# EAGLE board MONSTR_V0.1 (EAGLE 6.5.0)
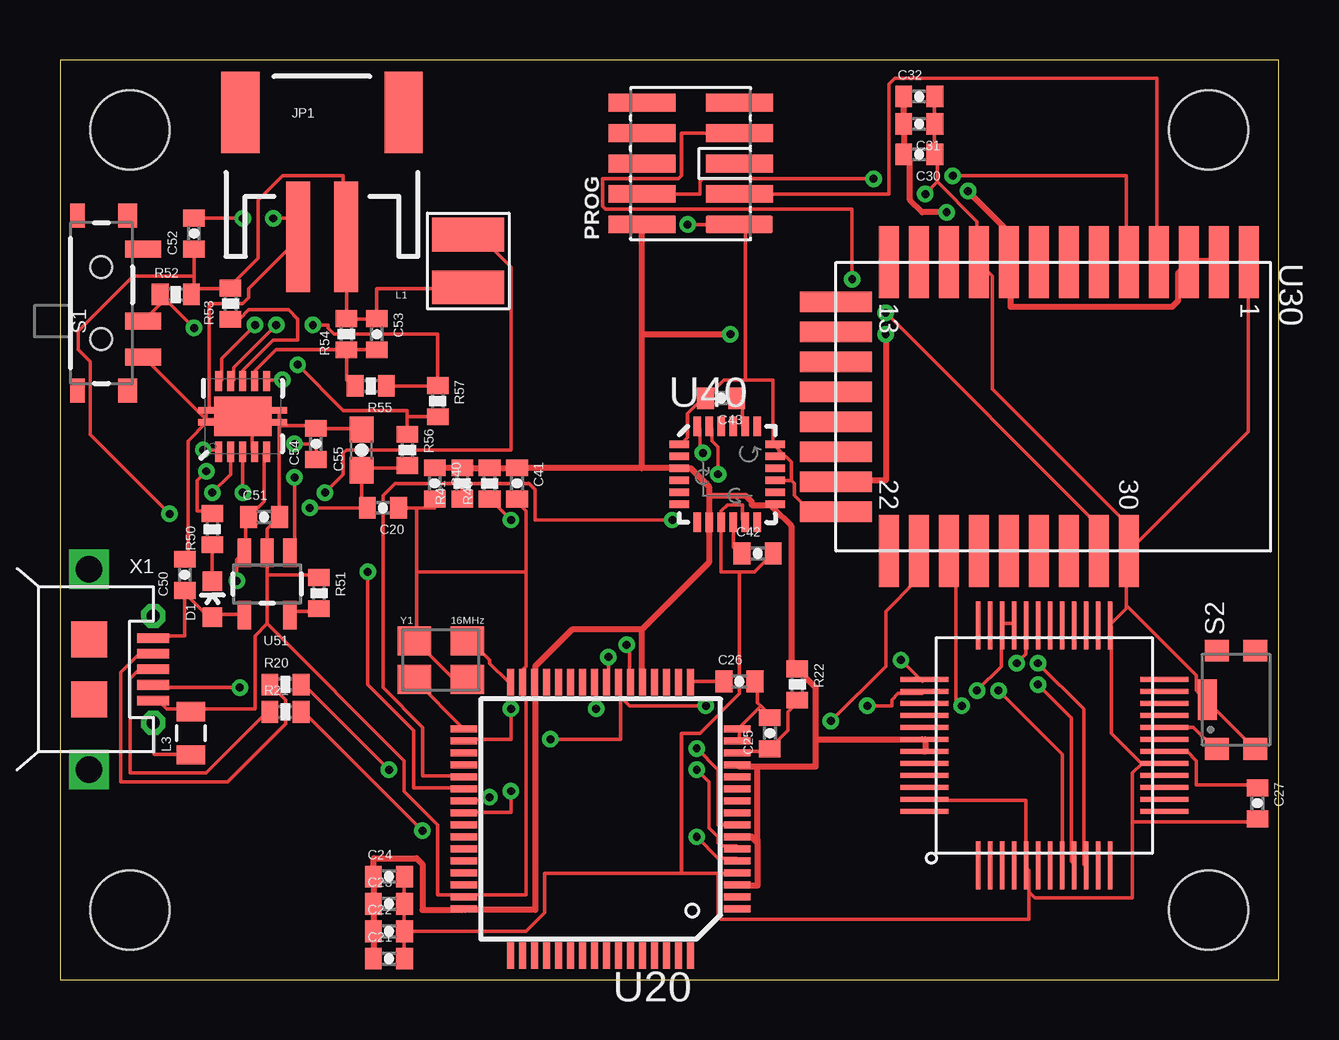
[diagram p0: board, top side]
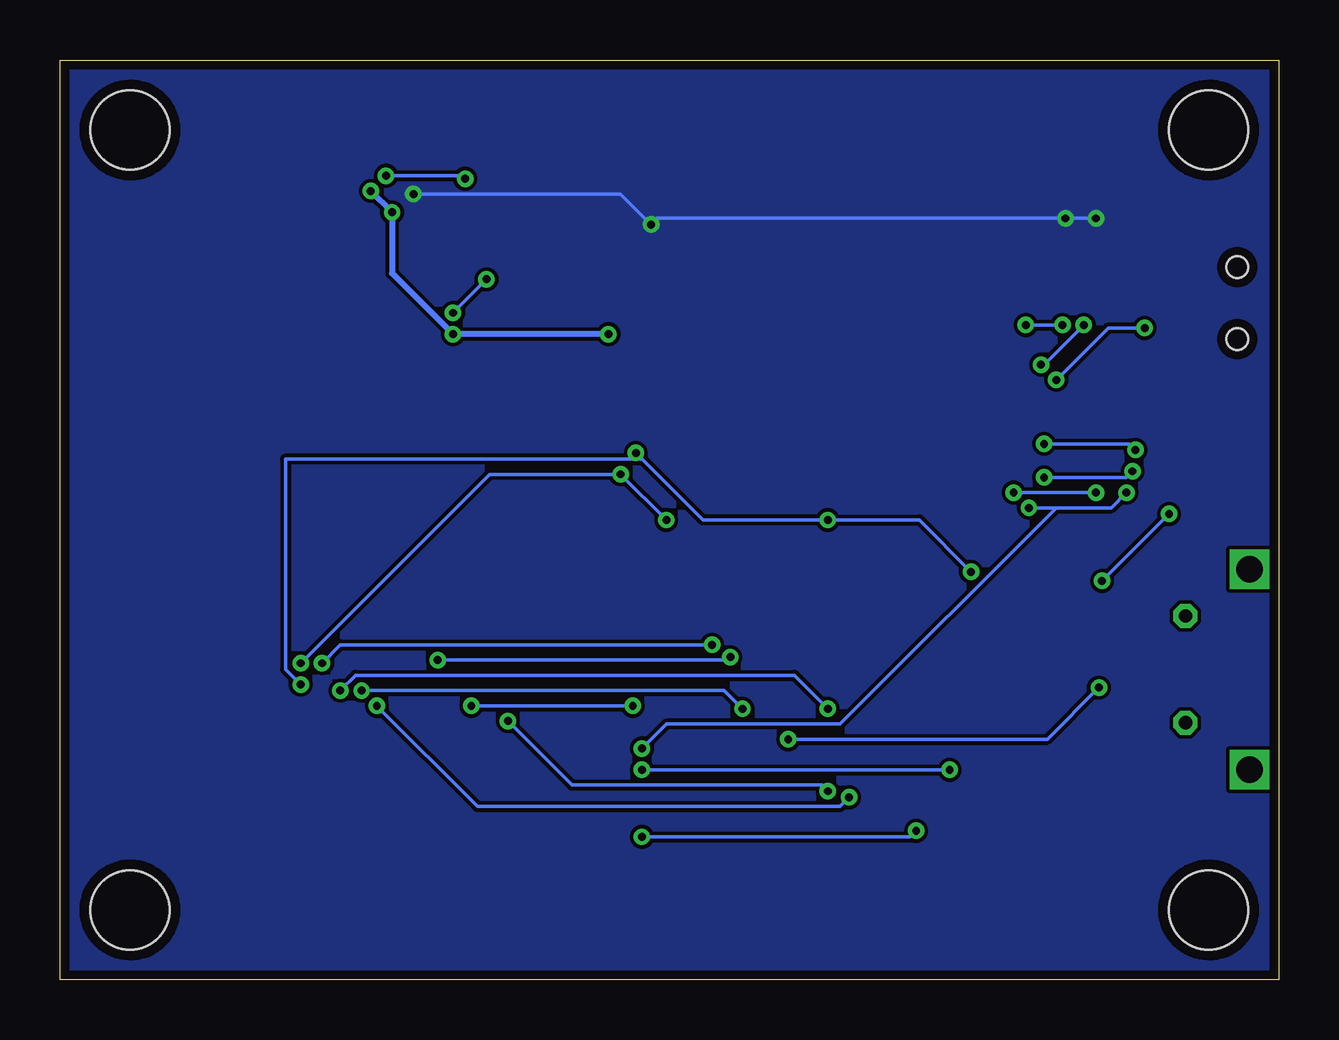
[diagram p1: board, bottom side, seen from below]

Size 50.8 x 38.35 mm. Coordinates in mm from the lower left corner, seen from the top.
Outline: 0,0 50.8,0 50.8,38.35 0,38.35 0,0
Copper layers (1*16): Top 0.0356mm / dielectric 1.5011mm / Bottom 0.0356mm
Design rules "LaenPCBOrder": minimum track width 6mil, minimum drill 13mil, track to track 6mil, track to pad 6mil, pad to pad 6mil, via to via 6mil, smd to smd 6mil, copper to edge 15mil, drill to drill 6mil, minimum pad ring 7mil, minimum via ring 7mil, stop-mask expansion 4mil, vias tented up to drill 0mil, thermal gap 10mil
Net classes: 1 power: width 0.254 mm, drill 0.33 mm, clearance 0.152 mm

## Footprints (pad centres in the part's own frame; a part is rotated, then mirrored left to right if it is on the bottom)
0402-CAP = smd 0.7 x 0.9: 1 -0.65,0; 2 0.65,0
0603-CAP = smd 1.1 x 1: 1 -0.85,0; 2 0.85,0
LED-0603 = smd 0.8 x 0.8: A 0,-0.75; C 0,0.75
JST-2-SMD = smd 1 x 4.6: 1 -1,-3.7; 2 1,-3.7 | smd 1.6 x 3.4: NC1 -3.4,1.5; NC2 3.4,1.5
STAND-OFF = hole 3.302: 0,0
BOURNS-SDR0302-SERIES-INDUCTOR = smd 3 x 1.4: 1 0,1.1; 2 0,-1.1
0805 = smd 0.8 x 1.2: 1 -0.9,0; 2 0.9,0
FTSH-105-DV = smd 0.74 x 2.8: 1 -2.54,-2.03; 2 -2.54,2.03; 3 -1.27,-2.03; 4 -1.27,2.03; 5 0,-2.03; 6 0,2.03; 7 1.27,-2.03; 8 1.27,2.03; 9 2.54,-2.03; 10 2.54,2.03
0402-RES = smd 0.7 x 0.9: 1 -0.65,0; 2 0.65,0
SWITCH-SPST-SMD-A = smd 0.7 x 1.5: 1 -2.25,-1.75; 2 -0.75,-1.75; 3 2.25,-1.75 | smd 1 x 0.6: GND1 -3.65,1; GND3 3.65,1 | smd 1 x 0.8: GND2 -3.65,-1.1; GND4 3.65,-1.1 | hole 0.9: -1.5,0; 1.5,0
101-IG = smd 0.9 x 1: 1 -2.05,0.8; 2 -2.05,-0.8; 3 2.05,0.8; 4 2.05,-0.8 | smd 1.7 x 0.8: GND 0,1.2
MK20DX128VLH5 = smd 1.1 x 0.285: 1 -5.605,3.385; 2 -5.605,2.885; 3 -5.605,2.385; 4 -5.605,1.885; 5 -5.605,1.385; 6 -5.605,0.885; 7 -5.605,0.385; 8 -5.605,-0.115; 9 -5.605,-0.615; 10 -5.605,-1.115; 11 -5.605,-1.615; 12 -5.605,-2.115; 13 -5.605,-2.615; 14 -5.605,-3.115; 15 -5.605,-3.615; 16 -5.605,-4.115; 33 5.795,-4.115; 34 5.795,-3.615; 35 5.795,-3.115; 36 5.795,-2.615; 37 5.795,-2.115; 38 5.795,-1.615; 39 5.795,-1.115; 40 5.795,-0.615; 41 5.795,-0.115; 42 5.795,0.385; 43 5.795,0.885; 44 5.795,1.385; 45 5.795,1.885; 46 5.795,2.385; 47 5.795,2.885; 48 5.795,3.385 | smd 0.285 x 1.1: 17 -3.655,-6.065; 18 -3.155,-6.065; 19 -2.655,-6.065; 20 -2.155,-6.065; 21 -1.655,-6.065; 22 -1.155,-6.065; 23 -0.655,-6.065; 24 -0.155,-6.065; 25 0.345,-6.065; 26 0.845,-6.065; 27 1.345,-6.065; 28 1.845,-6.065; 29 2.345,-6.065; 30 2.845,-6.065; 31 3.345,-6.065; 32 3.845,-6.065; 49 3.845,5.335; 50 3.345,5.335; 51 2.845,5.335; 52 2.345,5.335; 53 1.845,5.335; 54 1.345,5.335; 55 0.845,5.335; 56 0.345,5.335; 57 -0.155,5.335; 58 -0.655,5.335; 59 -1.155,5.335; 60 -1.655,5.335; 61 -2.155,5.335; 62 -2.655,5.335; 63 -3.155,5.335; 64 -3.655,5.335
MINI54TAN = smd 0.2 x 2: 1 -2.75,-5; 2 -2.25,-5; 3 -1.75,-5; 4 -1.25,-5; 5 -0.75,-5; 6 -0.25,-5; 7 0.25,-5; 8 0.75,-5; 9 1.25,-5; 10 1.75,-5; 11 2.25,-5; 12 2.75,-5; 25 2.75,5; 26 2.25,5; 27 1.75,5; 28 1.25,5; 29 0.75,5; 30 0.25,5; 31 -0.25,5; 32 -0.75,5; 33 -1.25,5; 34 -1.75,5; 35 -2.25,5; 36 -2.75,5 | smd 2 x 0.2: 13 5,-2.75; 14 5,-2.25; 15 5,-1.75; 16 5,-1.25; 17 5,-0.75; 18 5,-0.25; 19 5,0.25; 20 5,0.75; 21 5,1.25; 22 5,1.75; 23 5,2.25; 24 5,2.75; 37 -5,2.75; 38 -5,2.25; 39 -5,1.75; 40 -5,1.25; 41 -5,0.75; 42 -5,0.25; 43 -5,-0.25; 44 -5,-0.75; 45 -5,-1.25; 46 -5,-1.75; 47 -5,-2.25; 48 -5,-2.75
BLE112-A = smd 3 x 0.85: AVDD1 -6.05,6.9; AVDD2 -6.05,5.65; GND1 -6.05,8.15; GND2 -6.05,-3.1; GND4 6,3.15; P0_0 6,0.65; P0_1 6,-0.6; P0_2 6,-1.85; P0_3 6,-3.1; P0_4 6,-4.35; P0_5 6,-5.6; P0_6 6,-6.85; P1_5 -6.05,-6.85; P1_6 -6.05,-0.6; P1_7 -6.05,0.65; P2_0 -6.05,1.9; P2_1 -6.05,3.15; P2_2 -6.05,4.4; RESET 6,1.9; USB+ -6.05,-4.35; USB- -6.05,-5.6; VDD_USB -6.05,-1.85 | smd 0.85 x 3: DVDD 3.1,-9.05; GND3 4.35,-9.05; P0_7 1.85,-9.05; P1_0 0.6,-9.05; P1_1 -0.65,-9.05; P1_2 -1.9,-9.05; P1_3 -3.15,-9.05; P1_4 -4.4,-9.05
QFN-24-NP = smd 0.8 x 0.3: 1 -2,1.25; 2 -2,0.75; 3 -2,0.25; 4 -2,-0.25; 5 -2,-0.75; 6 -2,-1.25; 13 2,-1.25; 14 2,-0.75; 15 2,-0.25; 16 2,0.25; 17 2,0.75; 18 2,1.25 | smd 0.3 x 0.8: 7 -1.25,-2; 8 -0.75,-2; 9 -0.25,-2; 10 0.25,-2; 11 0.75,-2; 12 1.25,-2; 19 1.25,2; 20 0.75,2; 21 0.25,2; 22 -0.25,2; 23 -0.75,2; 24 -1.25,2
QFN-10_PAD = smd 0.297 x 0.85: 1 -1,-1.475; 2 -0.5,-1.475; 3 0,-1.475; 4 0.5,-1.475; 5 1,-1.475; 6 1,1.475; 7 0.5,1.475; 8 0,1.475; 9 -0.5,1.475; 10 -1,1.475 | smd 0.7 x 0.28: 11 -1.5,0.25; 12 -1.5,-0.25; 13 1.5,0.25; 14 1.5,-0.25 | smd 2.4 x 1.65: 15 0,0
SOT23-5 = smd 0.55 x 1.2: 1 -0.95,-1.3; 2 0,-1.3; 3 0.95,-1.3; 4 0.95,1.3; 5 -0.95,1.3
MICROUSB-47589-0001 = drill 0.55 pad 1 octagon: CGND 0,2.225; CGND@2 0,-2.225 | drill 1.1 pad 1.6 square: CGND@3 -2.675,-4.175; CGND@4 -2.675,4.175 | smd 1.5 x 1.5: CGND@5 -2.675,1.25; CGND@6 -2.675,-1.25 | smd 1.35 x 0.4: D+ 0,0; D- 0,0.65; GND 0,-1.3; ID 0,-0.65; VBUS 0,1.3
CRYSTAL-SMD-3.2_2.5MM = smd 1.4 x 1.2: 1 -1.1,-0.8; 2 1.1,-0.8; 3 1.1,0.8; 4 -1.1,0.8

## Placement (x,y rotation side)
C20  0.1uF  [0402-CAP]  13.46,19.68 180 top
C21  0.1uF  [0402-CAP]  13.72,0.89 0 top
C22  0.1uF  [0402-CAP]  13.72,2.03 0 top
C23  0.1uF  [0402-CAP]  13.72,3.17 0 top
C24  2.2uF  [0402-CAP]  13.72,4.32 0 top
C25  0.1uF  [0402-CAP]  29.59,10.29 90 top
C26  0.1uF  [0402-CAP]  28.32,12.45 0 top
C27  0.1uF  [0402-CAP]  49.91,7.37 270 top
C30  1uF  [0402-CAP]  35.81,34.42 180 top
C31  1uF  [0402-CAP]  35.81,35.69 180 top
C32  1uF  [0402-CAP]  35.81,36.83 0 top
C40  0.1uF  [0402-CAP]  15.62,20.7 270 top
C41  10nF  [0402-CAP]  19.05,20.7 270 top
C42  0.1uF  [0402-CAP]  29.08,17.78 0 top
C43  2.2nF  [0402-CAP]  27.56,24.26 180 top
C50  4.7uF  [0402-CAP]  5.21,16.89 90 top
C51  4.7uF  [0402-CAP]  8.51,19.3 0 top
C52  10uF  [0402-CAP]  5.59,31.11 90 top
C53  0.1uF  [0402-CAP]  13.21,26.92 270 top
C54  0.1uF  [0402-CAP]  10.67,22.35 90 top
C55  22uF  [0603-CAP]  12.57,22.1 90 top
D1  red  [LED-0603]  6.35,15.88 0 top
JP1  LiPo  [JST-2-SMD]  10.92,34.67 0 top
JP7  STAND-OFF  [STAND-OFF]  47.88,2.92 0 top
JP8  STAND-OFF  [STAND-OFF]  47.88,35.43 0 top
JP9  STAND-OFF  [STAND-OFF]  2.92,35.43 0 top
JP10  STAND-OFF  [STAND-OFF]  2.92,2.92 0 top
L1  SDR302-4R7ML 4.7uH, 1.2A  [BOURNS-SDR0302-SERIES-INDUCTOR]  17.02,29.97 180 top
L3  600ohm  [0805]  5.46,10.29 90 top
PROG  CONN_5-2-FTSH-V  [FTSH-105-DV]  26.29,34.04 90 top
R20  33  [0402-RES]  9.4,12.32 0 top
R21  33  [0402-RES]  9.4,11.18 0 top
R22  470  [0402-RES]  30.73,12.32 270 top
R40  10K  [0402-RES]  17.91,20.7 90 top
R41  10K  [0402-RES]  16.76,20.7 90 top
R50  470  [0402-RES]  6.35,18.8 90 top
R51  470  [0402-RES]  10.79,16.13 270 top
R52  10K  [0402-RES]  4.83,28.57 0 top
R53  10K  [0402-RES]  7.11,28.19 90 top
R54  2M  [0402-RES]  11.94,26.92 90 top
R55  220K  [0402-RES]  12.95,24.77 180 top
R56  2M  [0402-RES]  14.48,22.1 270 top
R57  220K  [0402-RES]  15.75,24.13 270 top
S1  SPST  [SWITCH-SPST-SMD-A]  1.73,28.22 90 top
S2  switch  [101-IG]  49.02,11.68 90 top
U20  MK20DX128VLH5  [MK20DX128VLH5]  22.63,6.35 180 top
U21  MINI54TAN  [MINI54TAN]  41.02,9.78 0 top
U30  BLE112-A  [BLE112-A]  41.4,23.88 270 top
U40  MPU-9150  [QFN-24-NP]  27.81,21.08 0 top
U50  TPS61200  [QFN-10_PAD]  7.62,23.5 0 top
U51  MCP73831  [SOT23-5]  8.64,16.51 180 top
X1  MICROUSB-47589-0001  [MICROUSB-47589-0001]  3.89,12.95 0 top
Y1  16MHz  [CRYSTAL-SMD-3.2_2.5MM]  15.88,13.34 0 top

## Library data of the parts
C20-C27 C30-C32 C40-C43 C50-C55 = SparkFun-Capacitors
D1 = SparkFun-LED
JP1 JP7-JP10 U50 U51 = SparkFun
L1 Y1 = BenLibrary
L3 R20-R22 R40 R41 R50-R57 = SparkFun-Passives
PROG = pel_misc
S1 = SparkFun-Electromechanical
S2 X1 = BLE112 Breakout Board v2.1-non-prefixed
U20 U21 = TeensyCustom
U30 = sf-bluegiga
U40 = SparkFun-Sensors

## Nets
5V: R56.1 R57.2 U50.10
EN: R52.1 S1.2 U50.6
GND: C20.1 C21.2 C22.2 C23.2 C24.2 C27.2 C30.1 C31.1 C32.2 C40.2 C41.2 C42.2 C43.2 C50.2 C51.2 C52.2 C54.2 C55.2 JP1.1 L3.2 PROG.1 R51.1 S1.1 S2.2 S2.GND U20.4 U20.31 U20.47 U21.5 U21.17 U21.25 U21.47 U30.GND1 U30.GND2 U30.GND3 U30.GND4 U40.1 U40.9 U40.11 U40.15 U40.17 U40.18 U50.4 U50.11 U50.12 U50.13 U50.14 U50.15 U51.2 X1.GND Y1.2 Y1.4
GND1: R55.1 R57.1 U50.9
N$1: C43.1 U40.20
N$2: C42.1 U40.10
N$4: R53.1 U50.8
N$5: R51.2 U51.5
N$6: R50.2 U51.1
N$7: U20.32 Y1.3
N$8: U20.33 Y1.1
N$15: C25.2 C26.2 U20.15 U20.16
N$16: R20.2 U20.6
N$17: R21.2 U20.5
N$18: R20.1 X1.D-
N$19: R21.1 X1.D+
N$20: L3.1 X1.CGND@2
N$21: C26.1 U20.17
N$22: C25.1 R22.2 U20.14
N$26: U20.23 U21.38 X1.ID
N$27: U20.25 U21.33 U21.34
N$28: U20.22 U21.32
N$29: U20.24 U21.37
N$32: S2.1 U21.20
N$33: U20.34 U21.8
N$54: C27.1 U21.18
N$56: D1.C R50.1
N$57: L1.2 U50.3
N$58: C54.1 U50.1
P2_1: PROG.4 U30.P2_1
P2_2: PROG.3 U30.P2_2
RESET: PROG.7 U30.RESET
TEENSY0RX1: U20.39 U30.P0_4
TEENSY1TX1: U20.40 U30.P0_5
TEENSY3V3 [power]: C21.1 C22.1 C23.1 C24.1 C30.2 C31.2 C32.1 C40.1 C41.1 PROG.2 R22.1 R40.2 R41.2 U20.3 U20.7 U20.13 U20.21 U20.30 U20.48 U21.42 U21.43 U30.AVDD1 U30.AVDD2 U30.DVDD U30.VDD_USB U40.3 U40.8 U40.13
TEENSY18SDA: R40.1 U20.38 U21.9 U40.24
TEENSY19SCL: R41.1 U20.37 U21.10 U40.23
TEENSYVIN: C20.2 C55.1 R56.2 U20.8 U50.2
USBVCC: C50.1 D1.A U51.4 X1.VBUS
UVLO: C53.2 R54.1 R55.2 U50.7
VBATT: C51.1 C52.1 C53.1 JP1.2 L1.1 R52.2 R53.2 R54.2 U50.5 U51.3

## Tracks (layer width: path | path; a pad name or v marks a point on that pad's centre or on a via)
5V  (via drill 0.33)
  Top 0.152: v8.13,27.3 6.73,25.91 6.73,25.02 U50.10 | v9.91,25.65 11.81,23.75 14.48,23.75 14.48,23.5 | R56.1 14.48,23.5 | 14.48,23.5 15.75,23.5 R57.2
  Bottom 0.152: v8.13,27.3 9.78,25.65 v9.91,25.65
EN  (via drill 0.33)
  Top 0.152: v9.27,25.02 8.64,25.02 U50.6 | 4.32,28.45 R52.1 4.32,28.45 | 4.32,28.45 v5.59,27.18 | 4.32,28.45 4.32,28.32 3.56,27.56 S1.2
  Bottom 0.152: v9.27,25.02 7.11,27.18 v5.59,27.18
GND  (via drill 0.33)
  Top 0.152: U40.1 25.91,22.35 26.16,22.61 26.16,23.62 26.8,24.26 C43.2 26.92,24.26 27.69,25.02 28.57,25.02 | 30.48,20.83 29.84,20.83 U40.15 | 30.48,20.83 30.48,21.59 29.97,22.1 | 29.97,22.1 29.84,22.23 U40.18 29.72,22.35 29.72,25.02 28.57,25.02 | 29.97,22.1 29.97,21.97 29.84,21.84 U40.17 | 30.48,20.83 30.61,20.7 30.61,20.19 31.24,19.56 32.26,19.56 U30.GND3 | 28.57,25.02 28.57,31.24 PROG.1 v26.16,31.5 | 14.86,19.68 15.62,19.68 C40.2 | 14.86,19.68 C20.1 | Y1.2 16.89,12.57 16.38,12.57 14.86,14.1 Y1.4 14.86,14.22 14.86,17.02 | 14.86,17.02 14.86,19.68 | 19.43,17.02 19.43,13.08 19.3,12.95 19.3,12.45 U20.31 19.3,12.32 19.3,11.81 19.43,11.68 19.43,3.56 16.89,3.56 U20.47 16.76,3.56 15.75,3.56 15.75,6.48 14.35,7.87 14.35,9.14 8.64,14.86 | 19.43,17.02 19.43,19.56 19.05,19.94 C41.2 | 19.43,17.02 14.86,17.02 | 5.46,11.3 4.45,11.3 4.19,11.56 3.94,11.56 X1.GND | 8.64,16.89 10.79,16.89 R51.1 | 8.64,16.89 U51.2 8.64,18.8 9.14,19.3 | 5.46,11.3 8.13,11.3 8.13,14.35 8.64,14.86 | 8.64,16.89 8.64,14.86 | 5.46,11.3 L3.2 | v7.62,31.75 C52.2 | v8.89,31.75 9.91,31.75 9.91,30.99 JP1.1 9.91,30.86 7.87,28.83 7.87,28.45 7.62,28.19 6.22,28.19 6.22,23.75 U50.11 6.1,23.62 6.1,23.37 | U50.14 9.14,23.37 9.14,23.62 U50.13 | 7.87,23.24 8,23.11 8,22.1 U50.4 | U50.12 6.22,23.37 7.62,23.37 U50.15 7.87,23.24 | 7.87,23.24 9.02,23.24 U50.14 | C50.2 5.21,17.65 5.33,17.78 5.33,22.48 6.1,23.24 U50.12 | 9.14,23.11 10.67,23.11 C54.2 10.67,22.99 12.57,22.99 C55.2 | 9.14,23.11 9.14,23.24 U50.14 | 6.1,23.37 3.56,25.91 S1.1 | 6.1,23.37 U50.12 | 9.14,23.11 9.14,19.3 | 9.14,19.3 C51.2 | 9.14,23.11 U50.14 | U40.11 28.45,19.18 28.45,19.81 27.81,19.81 27.56,19.56 27.56,19.18 U40.9 27.56,19.05 27.56,17.02 28.32,17.02
  Top 0.152: 28.32,17.02 28.96,17.02 29.72,17.78 C42.2 | 14.35,3.17 14.35,4.32 C24.2 | 14.35,2.03 14.35,0.89 C21.2 | 25.91,4.45 20.19,4.45 20.19,2.79 19.43,2.03 C22.2 14.35,2.03 | 25.91,4.45 27.43,4.45 | 27.43,4.45 28.19,4.45 U20.4 | 14.35,2.03 14.35,3.17 | 14.35,3.17 C23.2 | 28.32,17.02 28.32,11.94 26.67,10.29 25.91,10.29 25.91,4.45 | 36.45,35.69 36.45,34.42 C30.1 36.58,34.42 36.58,33.27 | 36.45,35.69 36.45,36.83 C32.2 | 36.45,35.69 C31.1 | 36.58,33.27 38.23,31.62 38.23,29.97 U30.GND2 38.35,29.84 38.86,29.34 38.86,24.64 44.45,19.05 44.45,17.91 U30.GND4 | U21.47 36.07,7.49 40.26,7.49 40.26,4.83 U21.5 40.26,4.7 40.39,4.57 40.39,3.68 | 44.7,6.6 49.91,6.6 C27.2 | 44.7,6.6 44.7,8.64 45.09,9.02 | 45.09,9.02 45.97,9.02 U21.17 45.09,9.02 | S2.2 49.78,9.65 47.88,11.56 47.88,11.68 S2.GND 47.75,11.68 47.37,12.06 47.37,12.7 44.45,15.62 | 44.45,15.62 44.45,17.78 U30.GND4 | 44.45,15.62 44.45,15.49 43.81,14.86 U21.25 43.81,14.73 43.81,10.29 45.09,9.02 | 40.39,3.68 40.64,3.43 44.7,3.43 44.7,6.6 | 27.43,4.45 27.43,2.67 27.56,2.54 40.39,2.54 40.39,3.68 | 36.58,33.27 v36.07,32.77 | U30.GND4 44.58,17.91 49.53,22.86 49.53,29.84 U30.GND1
  Bottom 0.152: v7.62,31.75 v8.89,31.75 25.91,31.75 v26.16,31.5 27.43,32.77 v36.07,32.77
  pour Bottom (isolate 0.152, rank 6): 0.38,37.97 50.42,37.97 50.42,0.38 0.38,0.38
GND1  (via drill 0.33)
  Top 0.152: v9.02,27.3 7.24,25.53 7.24,25.02 U50.9 | v10.54,27.3 11.18,27.3 11.18,27.18 11.43,26.92 15.75,26.92 R57.1 15.75,24.77 R55.1
  Bottom 0.152: v10.54,27.3 v9.02,27.3
N$1
  Top 0.152: U40.20 28.45,23.11 28.45,24.13 28.32,24.26 C43.1
N$2
  Top 0.152: U40.10 28.07,19.05 28.07,18.03 28.32,17.78 C42.1
N$4
  Top 0.152: U50.8 7.62,25.4 8.89,26.67 9.91,26.67 9.91,27.56 9.53,27.94 7.87,27.94 7.49,27.56 7.11,27.56 R53.1
N$5
  Top 0.152: R51.2 10.79,15.37 9.65,15.37 9.65,15.24 U51.5
N$6  (via drill 0.33)
  Top 0.152: v6.1,21.21 5.71,20.83 5.71,19.56 6.35,19.56 R50.2 | v9.78,20.95 9.78,18.03 9.65,17.91 U51.1
  Bottom 0.152: v6.1,21.21 6.35,20.95 v9.78,20.95
N$7
  Top 0.152: U20.32 18.67,12.45 17.91,13.21 17.91,13.34 17.02,14.22 Y1.3
N$8
  Top 0.152: U20.33 16.76,10.54 14.86,12.45 Y1.1
N$15
  Top 0.152: U20.15 28.32,10.03 28.32,10.41 U20.16 28.32,10.54 29.21,11.43 | 29.21,11.43 29.08,11.56 29.08,12.45 C26.2 | 29.21,11.43 29.59,11.05 C25.2
N$16  (via drill 0.33)
  Top 0.152: v13.72,8.76 10.16,12.32 R20.2 | v26.54,8.76 27.05,8.26 27.05,6.35 27.43,5.97 27.43,5.71 27.56,5.59 28.19,5.59 U20.6
  Bottom 0.152: v26.54,8.76 v13.72,8.76
N$17  (via drill 0.33)
  Top 0.152: v15.11,6.22 10.16,11.18 R21.2 | v26.54,5.97 27.43,5.08 28.19,5.08 U20.5
  Bottom 0.152: v15.11,6.22 15.37,5.97 v26.54,5.97
N$18
  Top 0.152: R20.1 8.76,12.32 9.4,11.68 9.4,10.67 6.99,8.26 2.54,8.26 2.54,12.83 3.3,13.59 3.81,13.59 X1.D-
N$19
  Top 0.152: X1.D+ 3.3,12.95 2.92,12.57 2.92,8.64 6.1,8.64 8.64,11.18 R21.1
N$20
  Top 0.152: L3.1 3.94,9.4 3.94,10.67 X1.CGND@2
N$21
  Top 0.152: C26.1 26.29,12.45 U20.17
N$22
  Top 0.152: U20.14 28.32,9.53 29.59,9.53 C25.1 29.59,9.65 30.35,10.41 30.35,11.18 30.73,11.56 R22.2
N$26  (via drill 0.33)
  Top 0.152: 23.37,11.81 23.37,12.32 U20.23 | 23.37,11.81 23.75,11.43 v26.92,11.43 | v33.66,11.43 34.67,11.43 34.67,11.68 34.92,11.94 35.94,11.94 U21.38 | v7.49,12.19 3.94,12.19 X1.ID | v20.45,10.03 23.37,10.03 23.37,11.81
  Bottom 0.152: v33.66,11.43 v26.92,11.43 | v7.49,12.19 9.65,10.03 v20.45,10.03
N$27  (via drill 0.33)
  Top 0.152: v22.35,11.3 22.35,12.32 U20.25 | v38.23,12.06 39.24,13.08 39.24,14.73 U21.34 39.37,14.86 39.75,14.86 U21.33
  Bottom 0.152: v22.35,11.3 23.11,12.06 v38.23,12.06
N$28  (via drill 0.33)
  Top 0.152: v23.62,13.97 23.75,13.84 23.75,12.45 U20.22 | v39.88,13.21 40.26,13.59 40.26,14.73 U21.32
  Bottom 0.152: v23.62,13.97 39.12,13.97 v39.88,13.21
N$29  (via drill 0.33)
  Top 0.152: v22.86,13.46 22.86,12.45 U20.24 | v35.05,13.34 35.94,12.45 U21.37
  Bottom 0.152: v22.86,13.46 22.99,13.34 v35.05,13.34
N$32
  Top 0.152: S2.1 48.13,9.65 47.24,10.54 46.1,10.54 U21.20
N$33  (via drill 0.33)
  Top 0.152: v18.8,11.3 18.8,10.03 16.89,10.03 U20.34 | v39.12,12.06 41.78,9.4 41.78,4.83 U21.8
  Bottom 0.152: v18.8,11.3 20.19,12.7 38.48,12.7 v39.12,12.06
N$54
  Top 0.152: C27.1 49.91,8.13 47.37,8.13 47.37,9.14 46.99,9.53 46.1,9.53 U21.18
N$56
  Top 0.152: R50.1 D1.C
N$57  (via drill 0.33)
  Top 0.152: v7.62,20.32 U50.3 | v11.05,20.32 11.81,21.08 11.81,21.97 11.94,22.1 18.8,22.1 18.8,29.72 17.53,30.99 17.02,30.99 L1.2
  Bottom 0.152: v11.05,20.32 v7.62,20.32
N$58  (via drill 0.33)
  Top 0.152: v5.97,22.1 6.6,22.1 U50.1 | v9.78,22.35 10.67,22.35 C54.1
  Bottom 0.152: v5.97,22.1 6.22,22.35 v9.78,22.35
P2_1  (via drill 0.33)
  Top 0.152: PROG.4 26.67,32.77 26.67,33.27 26.8,33.4 v33.91,33.4 | v37.21,33.53 44.45,33.53 44.45,29.97 U30.P2_1
  Bottom 0.152: v33.91,33.4 34.04,33.53 v37.21,33.53
P2_2
  Top 0.152: PROG.3 34.54,32.77 34.54,37.34 34.8,37.59 45.72,37.59 45.72,29.97 U30.P2_2
RESET  (via drill 0.33)
  Top 0.152: PROG.7 25.91,35.31 25.91,33.53 25.78,33.4 22.61,33.4 22.61,32.26 22.73,32.13 33.02,32.13 v33.02,29.21 | v34.42,27.81 43.18,19.05 43.18,17.91 U30.RESET
  Bottom 0.152: v34.42,27.81 v33.02,29.21
TEENSY0RX1  (via drill 0.33)
  Top 0.152: v17.91,7.62 17.91,7.49 16.89,7.49 U20.39 | v37.59,11.43 37.34,11.68 37.34,17.53 37.08,17.78 U30.P0_4
  Bottom 0.152: v17.91,7.62 18.29,7.24 33.4,7.24 v37.59,11.43
TEENSY1TX1  (via drill 0.33)
  Top 0.152: v18.8,7.87 18.8,6.99 16.89,6.99 U20.40 | v32.13,10.79 34.42,13.08 34.42,15.37 35.69,16.64 35.69,17.78 U30.P0_5
  Bottom 0.152: v18.8,7.87 19.05,8.13 29.46,8.13 v32.13,10.79
TEENSY3V3  (via drill 0.33)
  Top 0.254: U30.AVDD1 48.26,29.97 47.12,29.97 U30.AVDD2 46.99,29.84 46.61,29.46 46.61,28.32 46.35,28.07 39.62,28.07 39.62,29.84 U30.VDD_USB 39.5,29.97 39.5,31.24 v37.85,32.89 | 35.18,35.69 35.18,34.42 | 35.18,35.69 35.18,36.83 C32.1 | 35.18,35.69 C31.2 | 35.18,34.42 35.43,34.16 35.43,32.51 35.94,32 v36.96,32 | 35.18,34.42 C30.2 | v34.42,26.92 34.42,20.83 32.38,20.83 U30.DVDD | C22.1 C21.1 | C24.1 C23.1 | C24.1 13.08,5.08 14.86,5.08 15.11,4.83 15.11,2.92 16.76,2.92 U20.48 16.89,2.92 19.81,2.92 19.81,12.32 U20.30 19.81,12.45 19.81,13.08 21.34,14.61 24.26,14.61 | C24.1 | C23.1 C22.1 | C22.1 | C23.1 | 24.26,14.61 24.26,12.45 U20.21 | 29.02,5.78 28.83,5.97 28.32,5.97 U20.7 | 29.02,5.78 29.08,5.71 29.08,3.94 28.32,3.94 U20.3 | 29.08,8.89 28.32,8.89 U20.13 | 29.08,8.89 29.08,5.84 29.02,5.78 | U21.43 36.07,9.53 36.07,10.03 U21.42 35.94,10.03 31.5,10.03 | 16.76,21.34 15.62,21.34 C40.1 | 16.76,21.34 17.91,21.34 | 16.76,21.34 R41.2 | 17.91,21.34 19.05,21.34 | 17.91,21.34 R40.2 | 27.05,20.19 27.05,20.57 26.29,21.34 25.91,21.34 U40.3 25.78,21.34 24.26,21.34 | 27.05,20.19 27.05,19.18 U40.8 27.05,19.05 27.05,17.4 24.26,14.61 | 27.05,20.19 28.57,20.19 28.83,19.94 28.83,19.81 29.72,19.81 U40.13 29.72,19.68 30.48,18.92 30.48,13.34 30.73,13.08 R22.1 30.73,12.95 31.5,12.19 31.5,10.03 | 24.26,21.34 19.05,21.34 | 19.05,21.34 C41.1 | 24.26,21.34 24.26,26.92 | 24.26,26.92 PROG.2 | 29.08,8.89 31.5,8.89 31.5,10.03 | 24.26,26.92 v27.94,26.92
  Bottom 0.254: v37.85,32.89 v36.96,32 36.96,29.46 v34.42,26.92 v27.94,26.92
TEENSY18SDA  (via drill 0.33)
  Top 0.152: v26.8,21.97 26.67,22.1 26.67,22.99 U40.24 | v18.8,19.18 17.91,20.07 R40.1 | v12.83,17.02 12.83,12.32 14.73,10.41 14.73,8 16.76,8 U20.38 | v40.77,12.32 42.16,10.92 42.16,4.95 42.29,4.83 U21.9
  Bottom 0.152: 26.54,21.72 24,19.18 v18.8,19.18 14.99,19.18 v12.83,17.02 | 26.54,21.72 v26.8,21.97 | v40.77,12.32 41.4,12.95 41.4,21.72 26.54,21.72
TEENSY19SCL  (via drill 0.33)
  Top 0.152: v27.43,21.08 27.43,22.23 27.18,22.48 27.18,22.99 U40.23 | v25.53,19.18 19.81,19.18 19.81,20.45 19.56,20.7 16.76,20.7 | R41.1 16.76,20.7 | 16.76,20.7 13.97,20.7 13.46,20.19 13.46,12.19 15.11,10.54 15.11,8.51 16.76,8.51 U20.37 | v40.77,13.21 42.67,11.3 42.67,4.83 U21.10
  Bottom 0.152: v25.53,19.18 v27.43,21.08 32.89,21.08 v40.77,13.21
TEENSYVIN  (via drill 0.33)
  Top 0.152: R56.2 14.48,21.34 12.57,21.34 C55.1 12.57,19.68 | v6.35,20.32 7.11,21.08 7.11,21.97 U50.2 | C20.2 12.57,19.68 | 12.57,19.68 v10.41,19.68 | v26.54,9.65 27.43,8.76 27.43,6.48 28.19,6.48 U20.8
  Bottom 0.152: v6.35,20.32 6.99,19.68 9.27,19.68 | v10.41,19.68 9.27,19.68 | v26.54,9.65 25.53,10.67 18.29,10.67 9.27,19.68
USBVCC
  Top 0.152: 6.35,15.24 7.62,15.24 U51.4 | 5.21,16.13 6.1,15.24 6.35,15.24 | 6.35,15.24 D1.A | 5.21,16.13 5.21,14.35 3.94,14.35 X1.VBUS | 5.21,16.13 C50.1
UVLO
  Top 0.152: 11.94,26.29 9.02,26.29 8.13,25.4 8.13,25.02 U50.7 | R55.2 12.19,24.77 11.94,25.02 R54.1 11.94,26.29 | 11.94,26.29 13.21,26.29 C53.2
VBATT  (via drill 0.33)
  Top 0.152: U50.5 8.51,21.97 8.51,19.94 7.87,19.3 C51.1 7.75,19.3 7.75,17.91 U51.3 7.62,17.78 7.37,17.53 v7.37,16.64 | C52.1 5.59,29.34 | 5.59,29.34 5.59,28.83 | 5.59,28.83 5.59,28.57 R52.2 5.59,28.83 | 5.59,28.83 R53.2 7.11,28.96 8.26,30.1 8.26,32.51 9.27,33.53 11.81,33.53 11.81,30.99 JP1.2 11.94,30.86 R54.2 C53.1 13.21,28.83 17.02,28.83 L1.1 | v4.57,19.43 1.27,22.73 1.27,25.78 0.76,26.29 0.76,27.05 3.05,29.34 5.59,29.34
  Bottom 0.152: v4.57,19.43 v7.37,16.64